# Altium PCB Buck_5_12.PcbDoc
Units mm, origin at the board's own origin, x right, y up, seen from the top; angles counter-clockwise.
Board outline 105 x 62 mm, 2 copper layers (Top Layer, Bottom Layer); 18 components, 9 nets, 47 pads, 0 vias.
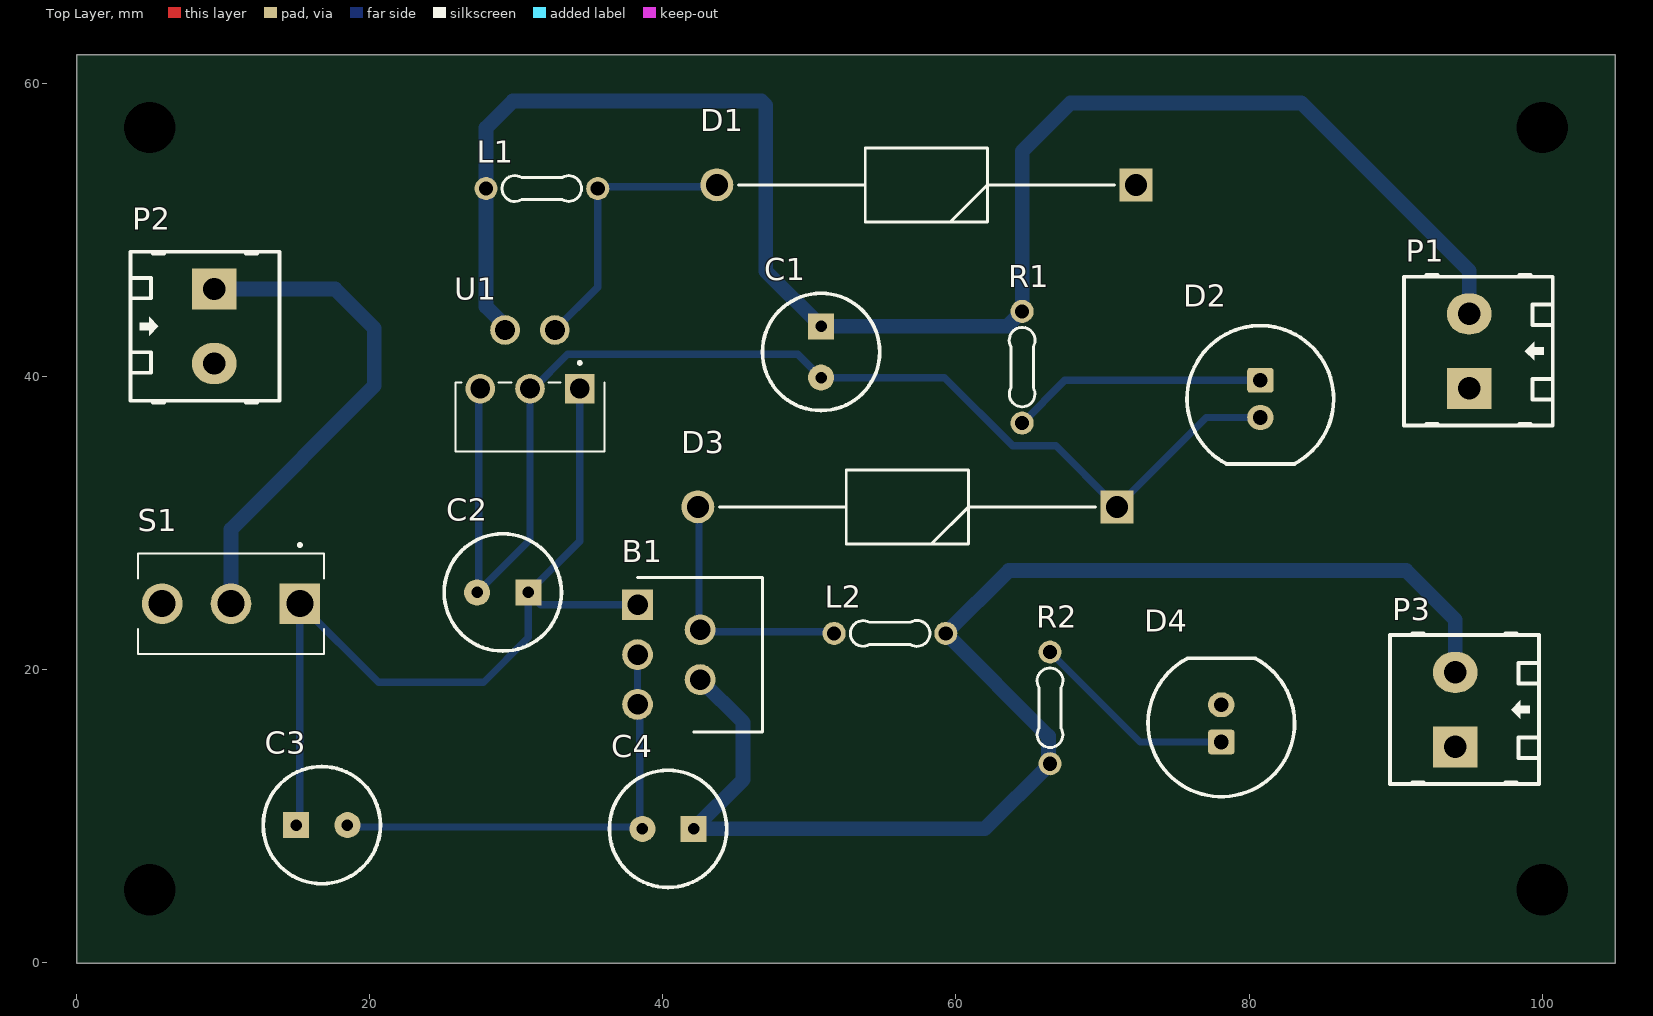
[diagram p0: Top Layer view]
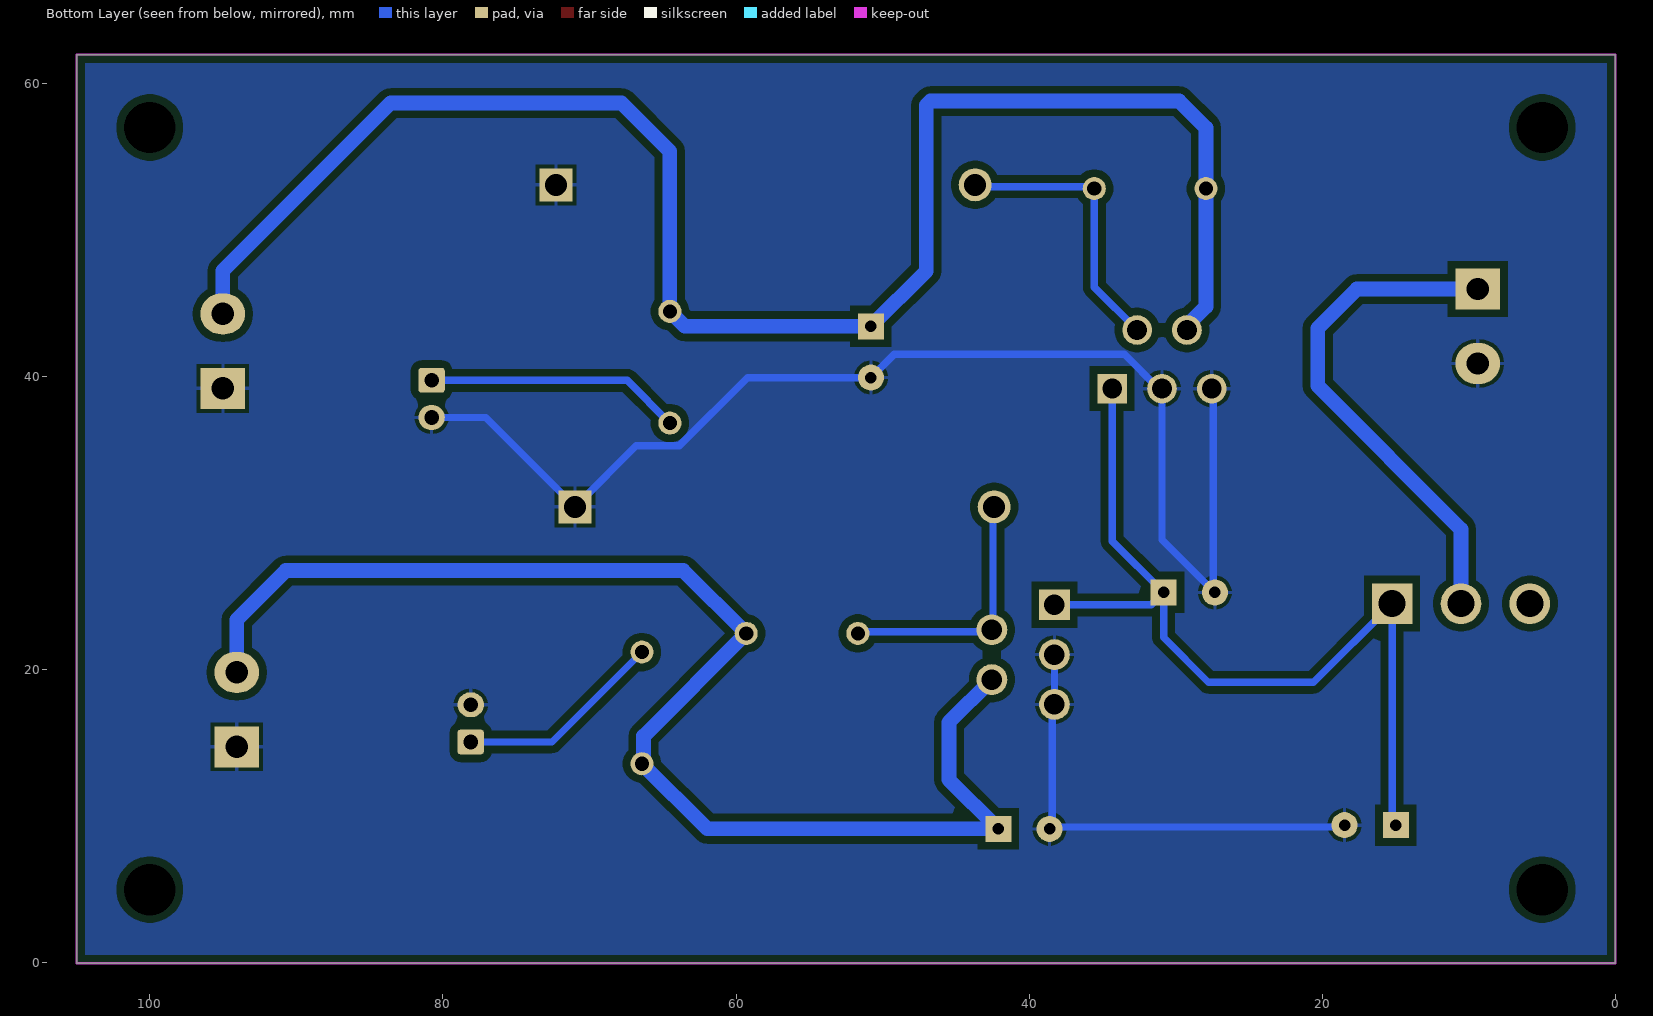
[diagram p1: Bottom Layer view, seen from below]
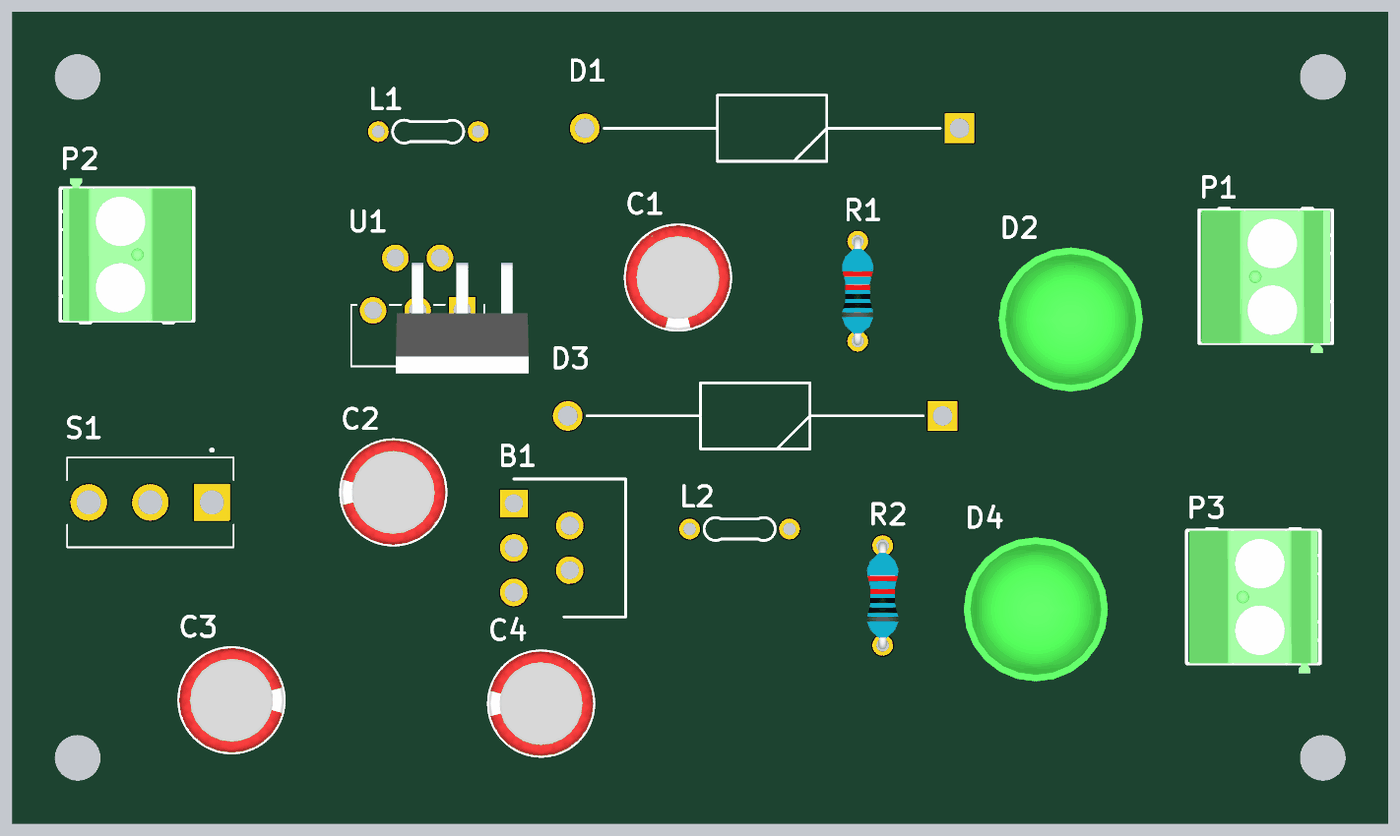
[diagram p2: 3D render of the assembled board from above, using the file's embedded part models]

## Layer stack, top to bottom
Top Solder: solder mask 0.0102, Solder Resist, Dk 3.5
Top Layer: signal copper 0.0356
Dielectric 1: dielectric 0.32, FR-4, Dk 4.8
Bottom Layer: signal copper 0.0356
Bottom Solder: solder mask 0.0102, Solder Resist, Dk 3.5

## Board outline
0,-0.024 105,-0.024 105,61.976 0,61.976

## Design rules (kind name [scope] priority, off if disabled: settings)
Clearance [All] p1: gap=0.508 ignorepadtopadclearanceinfootprint=FALSE
PolygonConnect [All] p1: connectstyle=Relief reliefconductorwidth=0.254 reliefentries=4 polygonreliefangle="90 Angle" airgapwidth=0.254
RoutingVias [All] p1: holewidth=0.711 width=1.27 viastyle="Through Hole" minholewidth=0.711 minwidth=1.27 maxholewidth=0.711 maxwidth=1.27
SolderMaskExpansion [All] p1: expansion=0.102 istentingtop=FALSE
SupplyNets "Schematic Supply Nets" [InNet('GND')] p1: voltage=0.000
Width [All] p1: maxlimit=2.54 minlimit=0.508 preferedwidth=1.016
30 further rules are at their usual default settings.

## Components (designator, comment, footprint, x,y, rotation, side; value= is the part's Value field where it differs from the comment)
B1 "LM2596T-12" TO170P470X1028X2142-5P 38.275,24.433 r270 top
C1 "1000uF" CAP/D80/H125/LS35 50.8,41.684 r270 top
C2 "100uF" CAP/D80/H125/LS35 29.083,25.273 r180 top
C3 "100uF" CAP/D80/H125/LS35 16.736,9.398 r0 top
C4 "1000uF" CAP/D80/H125/LS35 40.358,9.144 r180 top
D1 "1N5822-E3_54" DIOAD2855W132L835D505 72.288,53.086 r180 top
D2 "LED GREEN" "LED 10MM - GREEN" 80.772,38.481 r270 top
D3 "1N5822-E3_54" DIOAD2855W132L835D505 70.993,31.115 r180 top
D4 "LED GREEN" "LED 10MM - GREEN" 78.106,16.34 r90 top
L1 "100uH-3A" "R 1/4W" 35.56,52.832 r180 top
L2 "100uH-3A" "R 1/4W" 51.689,22.479 r0 top
P1 "Header 2" HDR/Terminal/2 95.015,41.743 r90 top
P2 "Header 2" HDR/Terminal/2 9.398,43.434 r270 top
P3 "Header 2" HDR/Terminal/2 94.069,17.284 r90 top
R1 "470R" "R 1/4W/300" 64.516,36.83 r90 top
R2 "470R" "R 1/4W/300" 66.421,13.589 r90 top
S1 "100SP1T1B4M2QE" SW_100SP1T1B4M2QE 10.541,24.511 r270 top
U1 "LM2596T-5.0" TO170P1016X470X2092-5 34.339,39.18 r180 top

## Footprints (in the part's own frame and the unit in brackets; to place one, negate y for a bottom-side part, rotate by r counter-clockwise, add the part's x,y. Pads: shape width x height; smd on the part's side, far side on the other; paste and mask are expansions set on the pad)
CAP/D80/H125/LS35 [mil] "Dia 8mm, Heigh 12.5mm, Lead Space 3.5mm (470uF/16V small)"
  rect 70x70 hole 31: 1(-68.9,0)
  round 70 hole 31: 2(68.9,0)
  silkscreen extent -157,-157 157,157, body extent -157,-157 157,157, height 454
DIOAD2855W132L835D505 [mm]
  rect 2.25x2.25 / inner round 2.25 / far side rect 2.25x2.25 hole 1.5: 1(0,0)
  round 2.25 hole 1.5: 2(28.6,0)
  silkscreen extent 1.48,-2.52 27.13,2.52
HDR/Terminal/2 [mil] "Header 2, 2 pin, hight 400mil, Pin to Pin 200mil, Colour Green"
  rect 110x120 hole 60: 1(-100,0)
  oval 110x120 hole 60: 2(100,0)
  silkscreen extent -200,-225 205,175, body extent -229,-218 200,168, height 559
"LED 10MM - GREEN" [mm]
  rrect25% 1.7x1.8 hole 1: 1(-1.27,0)
  oval 1.7x1.8 hole 1: 2(1.27,0)
  silkscreen extent -5,-5 4.44,5, body extent -5.5,-5.5 5.5,5.5, height 14.15
"R 1/4W" [mil] "Through hole resitor, axial 300mils, 1/4W"
  round 62 hole 38: 1(0,0) 2(300,0)
  silkscreen extent 44,-35 257,35
"R 1/4W/300" [mil] "Through hole resitor, axial 300mils, 1/4W"
  round 62 hole 38: 1(0,0) 2(300,0)
  silkscreen extent 44,-35 257,35, body extent -12,-47 312,47, height 97
SW_100SP1T1B4M2QE [mm]
  rect 2.775x2.775 hole 1.85: 1(0,4.7)
  round 2.775 hole 1.85: 2(0,0) 3(0,-4.7)
  silkscreen extent -4.1,-6.35 3.43,6.35
TO170P470X1028X2142-5P [mm]
  rect 2.1x2.1 / inner round 2.1 / far side rect 2.1x2.1 hole 1.4: 1(0,0)
  round 2.1 hole 1.4: 2(1.7,4.27) 3(3.4,0) 4(5.1,4.27) 5(6.8,0)
  silkscreen extent -1.87,0 8.67,8.53
TO170P1016X470X2092-5 [mm]
  rect 2.025x2.025 / inner round 2.025 / far side rect 2.025x2.025 hole 1.35: 1(0,0)
  round 2.025 hole 1.35: 2(1.7,-4) 3(3.4,0) 4(5.1,-4) 5(6.8,0)
  silkscreen extent -1.68,-1.85 8.48,4.28, body extent -5.08,-3.66 5.08,4.81, height 20.93

## Part data
B1: "IC, STEP-DOWN VOLTAGE REGULATOR", Manufacturer_Name="Texas Instruments", Mouser Part Number=926-LM2596T-12, Datasheet Link=http://www.ti.com/lit/ds/symlink/lm2596.pdf, Geometry.Height=4.7mm, Manufacturer_Part_Number=LM2596T-12, Mouser Price/Stock=https://www.mouser.co.uk/ProductDetail/Texas-Instruments/LM2596T-12?qs=X1J7HmVL2ZEBljJkxhFhyw%3D%3D
C1 C2 C3 C4: library part Capacitor, "Capacitor pol"
D1 D3: "VISHAY - 1N5822-E3/54 - Schottky Rectifier, 40 V, 3 A, Single, DO-201AD, 2 Pins, 525 mV", Arrow Part Number=1N5822-E3/54, Manufacturer_Name=Vishay, Mouser Part Number=625-1N5822-E3, Arrow Price/Stock=https://www.arrow.com/en/products/1n5822-e354/vishay?utm_currency=USD&region=nac, Datasheet Link=https://4donline.ihs.com/images/VipMasterIC/IC/VISH/VISH-S-A0001809980/VISH-S-A0001809988-1.pdf?hkey=6D3A4C79FDBF58556ACFDE234799DDF0, Manufacturer_Part_Number=1N5822-E3/54, Mouser Price/Stock=https://www.mouser.co.uk/ProductDetail/Vishay-General-Semiconductor/1N5822-E3-54?qs=7w0fSgRKp92xXX1kfLSISA%3D%3D
D2 D4: "Typical LED 3-pin 2-color"
L1 L2: library part Inductor, "Inductor"
P1 P2 P3: "Header, 2-Pin"
R1 R2: library part Resistor, "Resistor"
S1: "Toggle Switch SPDT Through Hole", PACKAGE=None, Availability=Unavailable, MP=100SP1T1B4M2QE, Price=None
U1: "SIMPLE SWITCHERÂ® 4.5V to 40V, 3A Low Component Count Step-Down Regulator 5-TO-220", PACKAGE="TO-220-5 Texas Instruments", Check_prices=https://www.snapeda.com/parts/LM2596T-5.0/Texas+Instruments/view-part/?ref=eda, MF="Texas Instruments", MP=LM2596T-5.0, SnapEDA_Link=https://www.snapeda.com/parts/LM2596T-5.0/Texas+Instruments/view-part/?ref=snap

## Free pads (board coordinates)
  round 0 / inner rrect10% 1.6x0.3 / far side round 0 hole 3.5 unplated mask+0.07: 2(5,5) 2(5,57) 2(100,5) 2(100,57)

## Nets (pads, with @x,y where several pads share a name; then routed paths per layer and width w, separated by ;. In a path a pad name is that pad's centre, name@x,y a point inside that pad or via, vN(x,y) a via of type N, cw(c..) or ccw(c..) an arc to the next point about the centre after c; other vN are vias at no path point)
+5: C1.1 L1.2 P1.2 R1.2 U1.4 | length 115.6
  Bottom Layer w1: U1.4 29.239,43.457 27.94,44.756 L1.2 27.94,56.99 29.751,58.801 32.131,58.801 46.736,58.801 47.034,58.503 47.034,47.2 C1.1 63.5,43.434 R1.2 64.516,55.372 67.818,58.674 83.566,58.674 95.015,47.225 P1.2
+12: B1.4 C4.1 L2.2 P3.2 R2.1 | length 92.3
  Bottom Layer w1: B1.4 45.474,16.404 45.474,12.51 C4.1 61.976,9.144 R2.1 66.311,13.699 66.311,15.477 L2.2 63.6,26.77 90.714,26.77 94.069,23.415 P3.2
GND: B1.3 B1.5 C1.2 C2.2 C3.2 C4.2 D1.1 D2.2 D3.1 D4.2 P1.1 P2.2 P3.1 U1.3 U1.5 | length 119.6
  Bottom Layer w0.508: C3.2 18.613,9.271 38.481,9.271 C4.2 38.442,9.31 38.442,17.467 B1.5 B1.3 ; C2.2 C2.2@27.436,25.376 ; U1.5 27.436,39.077 C2.2@27.436,25.376 ; D4.2 D4.2@78.297,17.801 ; D2.2@80.581,37.02 D2.2 ; D2.2@80.581,37.211 77.089,37.211 D3.1 70.739,31.369 66.827,35.281 63.874,35.281 59.221,39.934 C1.2 49.205,41.529 33.498,41.529 31.149,39.18 U1.3 30.939,28.879 C2.2@27.436,25.376 ; P1.1@94.888,39.203 P1.1
NetB1_1: B1.1 C2.1 C3.1 S1.1 U1.1 | length 60.5
  Bottom Layer w0.508: C3.1 15.241,9.653 S1.1 20.619,19.133 27.765,19.133 30.833,22.201 C2.1 ; U1.1 34.339,28.779 C2.1 ; B1.1 31.673,24.433 C2.1
NetB1_2: B1.2 D3.2 L2.1 | length 17.7
  Bottom Layer w0.508: D3.2 42.469,31.039 42.469,22.809 B1.2 42.672,22.606 51.562,22.606 L2.1
NetD1_2: D1.2 L1.1 U1.2 | length 19.1
  Bottom Layer w0.508: U1.2 35.56,46.101 L1.1 35.687,52.959 43.561,52.959 D1.2
NetD2_1: D2.1 R1.1 | length 17.5
  Bottom Layer w0.508: R1.1 67.437,39.751 D2.1
NetD4_1: D4.1 R2.2 | length 14.2
  Bottom Layer w0.508: R2.2 72.56,15.07 D4.1
VCC: P2.1 S1.2 | length 34.9
  Bottom Layer w1: P2.1 17.653,45.974 20.32,43.307 20.32,39.37 10.541,29.591 S1.2
pads on no net: S1.3

## Polygon pours and split planes (outlines as drawn)
GND on Bottom Layer "GND_L02_P000" (solid, remove dead copper, pour order 0): 0,61.976 105,61.976 105,-0.024 0,-0.024

## Keep-outs
Bottom Layer:
  the board outline again, w0.15